# EAGLE board AOC v1 PANEL (EAGLE 7.7.0)
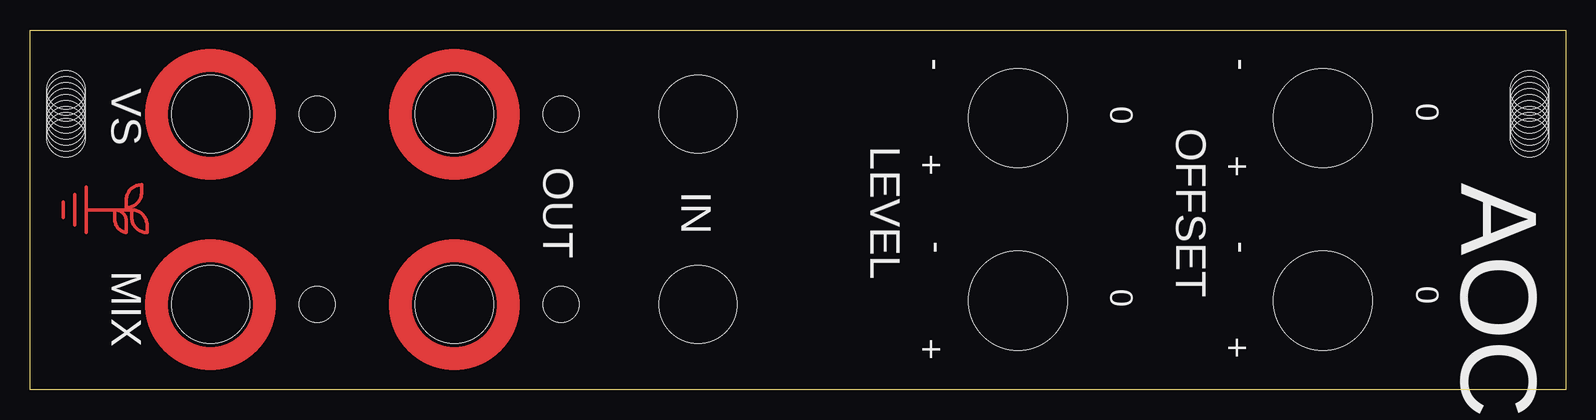
[diagram p0: board, top side]
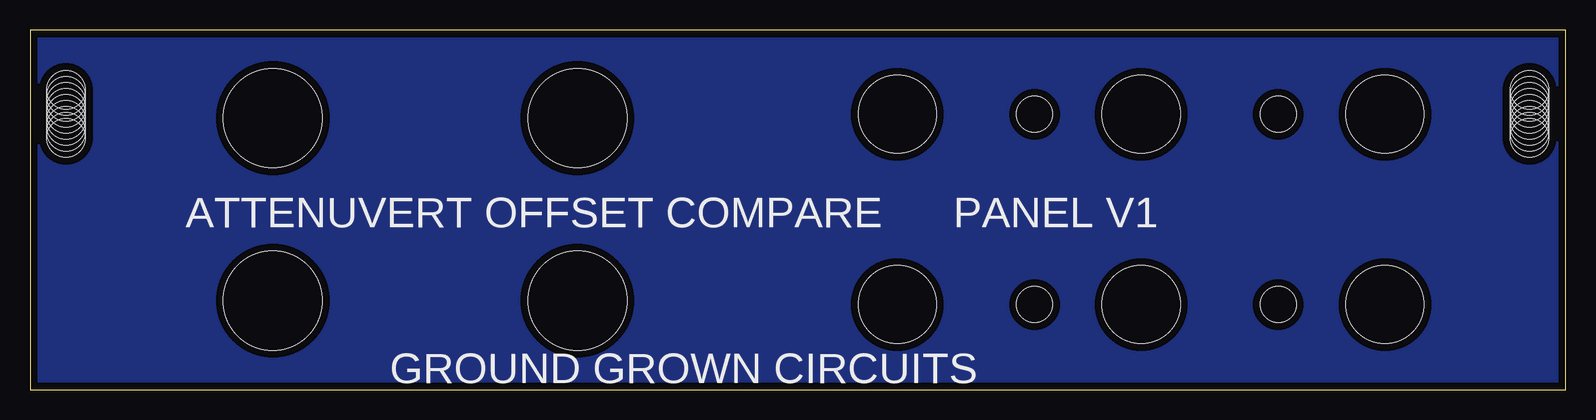
[diagram p1: board, bottom side, seen from below]

Size 128 x 30 mm. Coordinates in mm from the lower left corner, seen from the top.
Outline: 0,0 0,30 128,30 128,0 0,0
Copper layers (1*16): Top 0.035mm / dielectric 1.5mm / Bottom 0.035mm
Design rules "SparkFun": minimum track width 8mil, minimum drill 20mil, track to track 8mil, track to pad 8mil, pad to pad 8mil, via to via 8mil, smd to smd 8mil, copper to edge 8mil, drill to drill 8mil, minimum pad ring 12mil, minimum via ring 10mil, stop-mask expansion 4mil, vias tented up to drill 20mil, thermal gap 10mil

## Footprints (pad centres in the part's own frame; a part is rotated, then mirrored left to right if it is on the bottom)
POT_DRILL = hole 8.25: 0,0
JACK_DRILL_COPPER = hole 6.5: 0,0
LED_3MM_DRILL = hole 3: 0,0
MOUNT_DRILL = hole 3.2: 3,9; 3,8.5; 3,8; 3,7.5; 3,7; 3,6.5; 3,6; 3,5.5; 3,5
JACK_DRILL = hole 6.5: 0,0

## Placement (x,y rotation side)
ATV1  B100K  [POT_DRILL]  82.36,22.65 180 top
ATV2  B100K  [POT_DRILL]  82.36,7.41 180 top
COMP  [JACK_DRILL_COPPER]  15.05,22.97 0 top
D1  [LED_3MM_DRILL]  44.27,22.97 0 top
D2  [LED_3MM_DRILL]  44.27,7.09 0 top
D3  [LED_3MM_DRILL]  23.95,7.09 0 top
D4  [LED_3MM_DRILL]  23.95,22.97 0 top
E$1  [MOUNT_DRILL]  128,30 180 top
E$2  [MOUNT_DRILL]  0,30 180 bottom
E$3  [LOGO_SMALL_COPPER]  4.75,15 270 top
IN1  [JACK_DRILL]  55.7,22.97 270 top
IN2  [JACK_DRILL]  55.7,7.09 270 top
MIX  [JACK_DRILL_COPPER]  15.05,7.09 180 top
OFF1  B100K  [POT_DRILL]  107.77,22.65 180 top
OFF2  B100K  [POT_DRILL]  107.77,7.41 180 top
OUT1  [JACK_DRILL_COPPER]  35.38,22.97 270 top
OUT2  [JACK_DRILL_COPPER]  35.38,7.09 270 top

## Library data of the parts
ATV1 ATV2 OFF1 OFF2 = GroundGrownCircuits; PROD_ID: RES-09177
COMP D1-D4 E$1-E$3 IN1 IN2 MIX OUT1 OUT2 = GroundGrownCircuits

## Tracks (layer width: path | path; a pad name or v marks a point on that pad's centre or on a via)
S$1
  pour Bottom (isolate 0.61): 0,0 128,0 128,30 0,30

## Text on the board
tPlace: - | - | VS | 0 | 0 | + | + | AOC | OUT | IN | LEVEL | OFFSET | - | - | 0 | 0 | MIX | + | +
bPlace: PANEL V1 | ATTENUVERT OFFSET COMPARE | GROUND GROWN CIRCUITS